# EAGLE board untitled (EAGLE 9.6.2)

Size 100 x 80 mm. Coordinates in mm from the lower left corner, seen from the top.
Outline: 0,0 100,0 100,80 0,80 0,0
Copper layers (1*16): Top 0.035mm / dielectric 1.5mm / Bottom 0.035mm
Design rules "default": minimum track width 6mil, minimum drill 0.35mm, track to track 6mil, track to pad 6mil, pad to pad 6mil, via to via 6mil, smd to smd 6mil, copper to edge 40mil, drill to drill 6mil, minimum pad ring 10mil, minimum via ring 8mil, stop-mask expansion 4mil, vias tented up to drill 0mil, thermal gap 10mil

## Footprints (pad centres in the part's own frame; a part is rotated, then mirrored left to right if it is on the bottom)
MT6-6 = drill 1.803 long: 1 -9.906,0; 2 -5.944,0; 3 -1.981,0; 4 1.981,0; 5 5.944,0; 6 9.906,0
DIL08 = drill 0.813 pad 1.6 octagon: 1 -3.81,-3.81; 2 -1.27,-3.81; 3 1.27,-3.81; 4 3.81,-3.81; 5 3.81,3.81; 6 1.27,3.81; 7 -1.27,3.81; 8 -3.81,3.81

## Placement (x,y rotation side)
SV1  [MT6-6]  -26.67,5.08 0 top  (outside the outline)
U$1  MAX485DIL  [DIL08]  -20.32,17.78 0 top  (outside the outline)

## Library data of the parts
SV1 = con-amp-mt; OC_FARNELL: unknown; OC_NEWARK: unknown
U$1 = MAXIM